# Altium PCB PCB2.PcbDoc
Units mm, origin at the board's own origin, x right, y up, seen from the top; angles counter-clockwise.
Board outline 96.65 x 43.18 mm, 2 copper layers (Top Layer, Bottom Layer); 19 components, 18 nets, 61 pads, 0 vias.
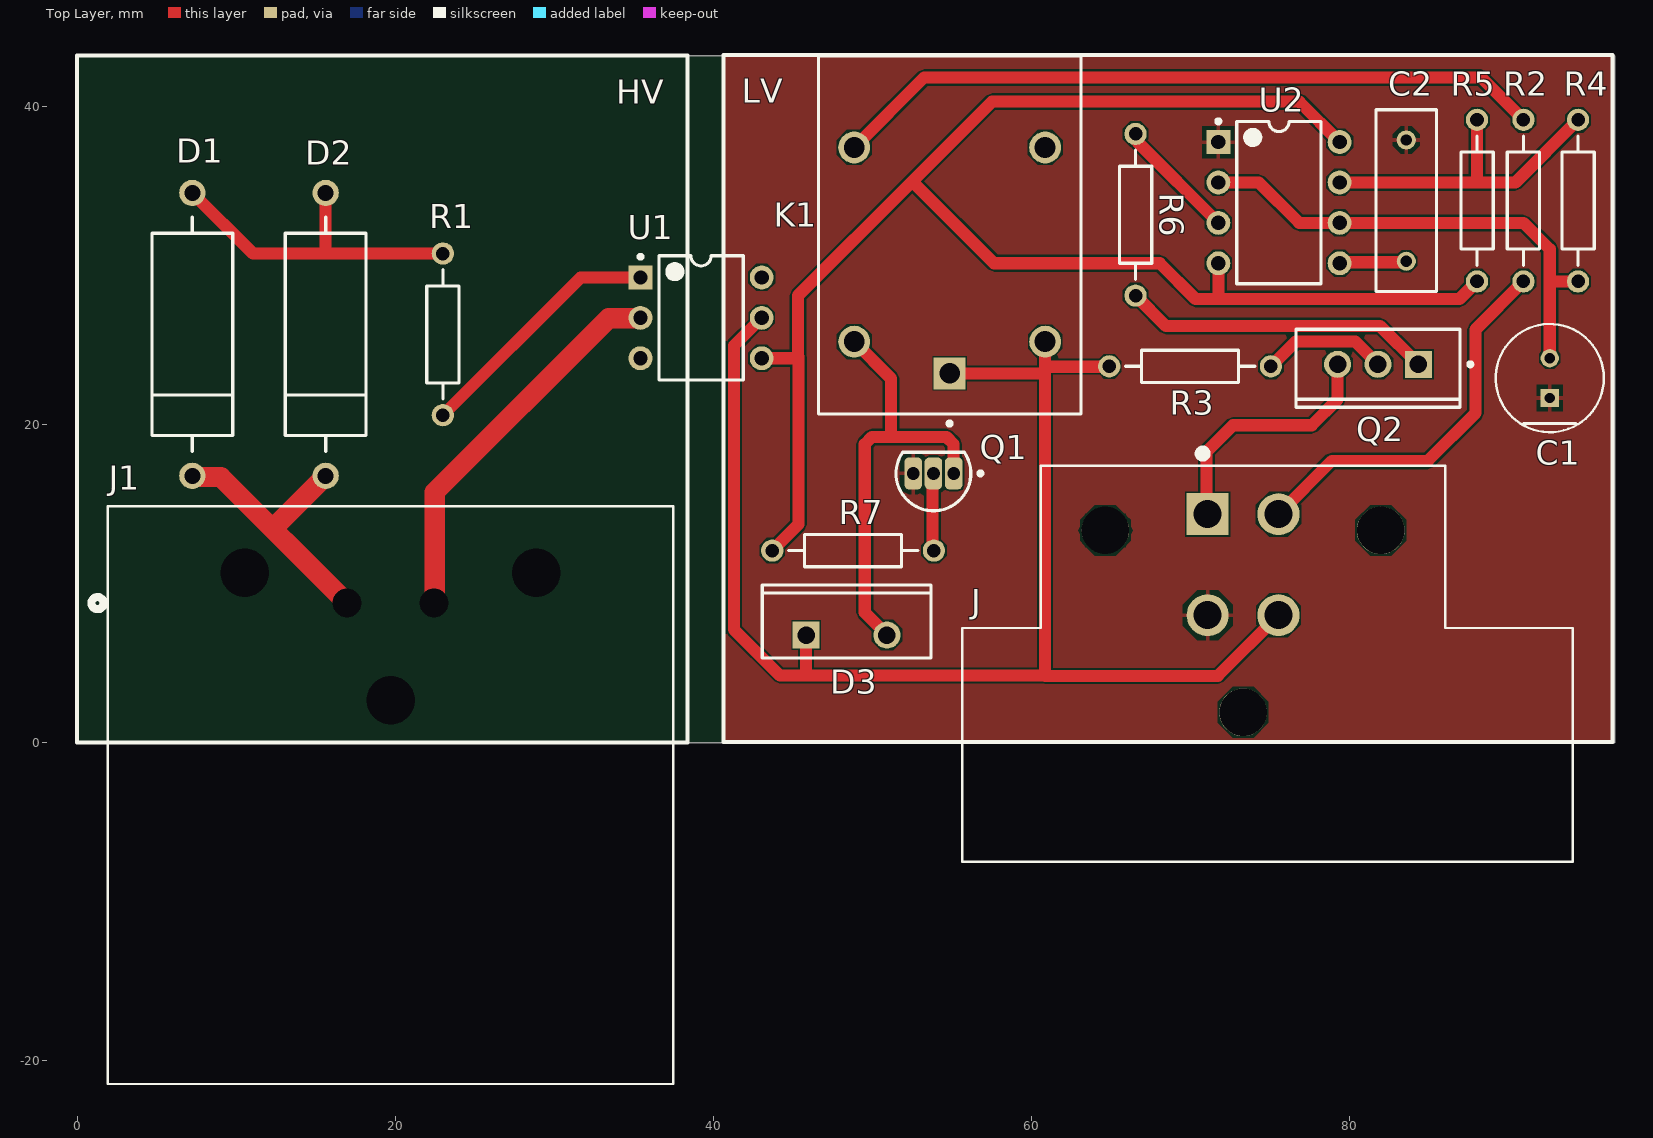
[diagram p0: Top Layer view]
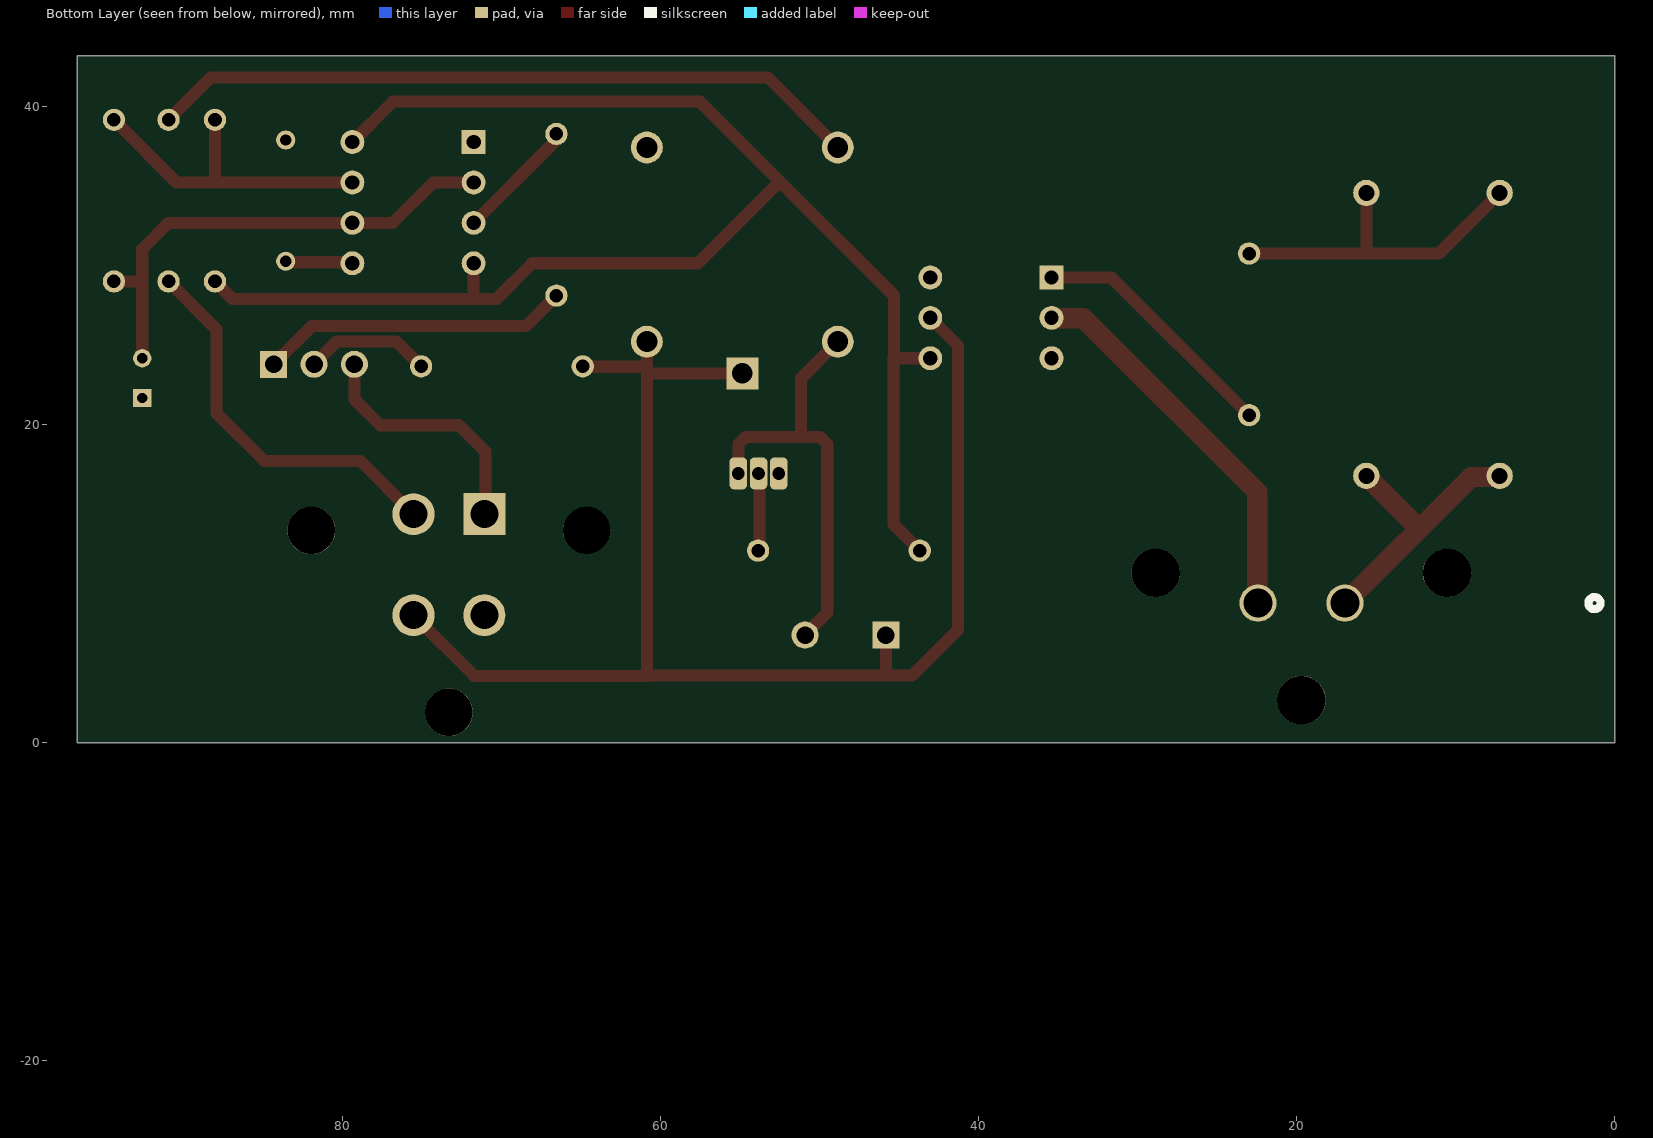
[diagram p1: Bottom Layer view, seen from below]

## Layer stack, top to bottom
Top Solder: solder mask 0.0102, Solder Resist, Dk 3.5
Top Layer: signal copper 0.0356
Dielectric 1: dielectric 0.32, FR-4, Dk 4.8
Bottom Layer: signal copper 0.0356
Bottom Solder: solder mask 0.0102, Solder Resist, Dk 3.5

## Board outline
0,0 0,43.18 96.647,43.18 96.647,0

## Design rules (kind name [scope] priority, off if disabled: settings)
Clearance [All] p1: gap=0.1 ignorepadtopadclearanceinfootprint=FALSE except(0: Arc-Hole Track-Hole SMDPad-Hole THPad-Hole Via-Hole Fill-Hole Poly-Hole Region-Hole Text-Hole)
PasteMaskExpansion [All] p1: expansion=-2539.975 usepaste=FALSE
PolygonConnect [All] p1: connectstyle=Relief reliefconductorwidth=0.254 reliefentries=4 polygonreliefangle="90 Angle" airgapwidth=0.254
RoutingVias [All] p1: holewidth=0.711 width=3 viastyle="Through Hole" minholewidth=0.711 minwidth=3 maxholewidth=0.711 maxwidth=3
SolderMaskExpansion [All] p1: expansion=0.254 istentingtop=FALSE
Width 12V [InNet('12V_LV')] p1: maxlimit=0.762 minlimit=0.762 preferedwidth=0.762 minimp=50.000000 maximp=50.000000 favimp=50.000000
Width HV- [InNet('HV-')] p2: maxlimit=1.27 minlimit=1.27 preferedwidth=1.27 minimp=50.000000 maximp=50.000000 favimp=50.000000
Width HV+ [InNet('HV+')] p3: maxlimit=1.27 minlimit=1.27 preferedwidth=1.27 minimp=50.000000 maximp=50.000000 favimp=50.000000
Width [All] p4: maxlimit=0.762 minlimit=0.762 preferedwidth=0.762 minimp=50.000000 maximp=50.000000 favimp=50.000000
29 further rules are at their usual default settings.

## Classes and differential pairs
component class Esquematico_TSAL_controladora: C1 C2 D1 D2 D3 J J1 K1 Q1 Q2 R1 R2 R3 R4 R5 R6 R7 U1

## Components (designator, comment, footprint, x,y, rotation, side; value= is the part's Value field where it differs from the comment)
C1 "UKL1A101KED1TD" FP-UKL1A101KED1TD-MFG 92.555,22.904 r90 top value=100uF
C2 "Cap" RAD-0.3 83.538,34.06 r90 top value=100pF
D1 "D Zener" DIODE-0.7 7.239,25.654 r270 top
D2 "D Zener" DIODE-0.7 15.621,25.654 r270 top
D3 "Diode 10TQ035" TO-220AC 48.359,6.755 r0 top
J "DT13-4P" TE_DT13-4P 73.279,8.001 r90 top
J1 "DT13-2P" CONN2_DT13-2P_TEC 16.967,8.763 r180 top
K1 "G5LE-14-CF-36 DC12" FP-G5LE-14-CF-36_DC12-MFG 54.836,31.901 r90 top
Q1 "BC548B" ONSC-TO-92-3-29-11 53.82,16.915 r180 top locked
Q2 "TIP122" ONSC-TO-220-3-221A-09 81.76,23.773 r270 top
R1 "Res2" AXIAL-0.4 22.987,25.654 r270 top value=570
R2 "Res2" AXIAL-0.4 90.904,34.06 r270 top value=23
R3 "Res2" AXIAL-0.4 69.949,23.646 r0 top value=24
R4 "Res2" AXIAL-0.4 94.333,34.06 r270 top value=1K
R5 "Res2" AXIAL-0.4 87.983,34.06 r90 top value=1K
R6 "Res2" AXIAL-0.4 66.52,33.171 r270 top value=600
R7 "Res2" AXIAL-0.4 48.768,12.065 r0 top value=2160
U1 "4N37" LTST-DIP-6_A 39.215,26.694 r0 top
U2 "NE555P" P0008A 75.537,33.933 r0 top

## Footprints (in the part's own frame and the unit in brackets; to place one, negate y for a bottom-side part, rotate by r counter-clockwise, add the part's x,y. Pads: shape width x height; smd on the part's side, far side on the other; paste and mask are expansions set on the pad)
AXIAL-0.4 [mm] "Axial Device, Thru-Hole; 2 Leads; 0.4 in Pin Spacing"
  round 1.4 hole 0.85: 1(-5.08,0) 2(5.08,0)
  silkscreen extent -4.06,-1.02 4.06,1.02
CONN2_DT13-2P_TEC [mil]
  round 60 / inner round 60 / far side round 92 hole 72 paste-46 mask+0: 1(0,0) 2(-215,0)
  round 60 / inner round 60 / far side round 120 hole 120 unplated paste-60 mask-60: 3(-468,-75) 4(253,-75) 5(-107.5,240)
  silkscreen extent -808,-240 632,1190
DIODE-0.7 [mm] "Diode, Thru-Hole; 2 Leads; 0.7 in Pin Spacing"
  round 1.65 hole 1: 1(-8.89,0) 2(8.89,0)
  silkscreen extent -7.37,-2.54 7.37,2.54
FP-G5LE-14-CF-36_DC12-MFG [mm]
  rect 2x2 hole 1.3 paste-1000 mask+0: 1(-8.7,0)
  round 2 hole 1.3 paste-1000 mask+0: 2(-6.7,-6) 3(5.5,-6) 4(5.5,6) 5(-6.7,6)
  silkscreen extent -11.97,-8.25 11.25,8.25, body extent -11.35,-8.35 11.35,8.35, height 0.25
FP-UKL1A101KED1TD-MFG [mm]
  rect 1.15x1.15 hole 0.65 paste-1000 mask+0: 1(-1.25,0)
  round 1.15 hole 0.65 paste-1000 mask+0: 2(1.25,0)
  silkscreen extent -3.4,-3.4 3.4,3.4, body extent -3.5,-3.5 3.5,3.5, height 0.25
LTST-DIP-6_A [mm] "DIP, 6-Leads, Body 7.8x7mm, Pitch 2.54mm"
  rect 1.5x1.5 hole 0.9: 1(-3.81,2.54)
  round 1.5 hole 0.9: 2(-3.81,0) 3(-3.81,-2.54) 4(3.81,-2.54) 5(3.81,0) 6(3.81,2.54)
  silkscreen extent -3.93,-3.9 2.65,3.96, body extent -3.95,-3.9 3.95,3.9, height 4.5
ONSC-TO-92-3-29-11 [mm] "TO, 3-Leads, Body Dia 4.7mm, Pitch 1.27mm"
  rrect50% 1.1x2 hole 0.8 mask+0.254: 1(-1.27,0) 3(1.27,0)
  rrect50% 1.1x2 hole 0.8 paste-2539.97 mask+0.05: 2(0,0)
  silkscreen extent -3.08,-1.34 2.35,2.35, body extent -2.35,-1.33 2.36,2.36, height 7.87
ONSC-TO-220-3-221A-09 [mm] "FM, 3-Leads, Body 10.3x4.85mm, Pitch 2.54mm"
  rect 1.7x1.7 hole 1.1: 1(0,2.54)
  round 1.7 hole 1.1: 2(0,0) 3(0,-2.54)
  silkscreen extent -2.2,-5.15 2.7,5.93, body extent -2.18,-5.15 2.67,5.15, height 19.85
P0008A [mm] "DIP, 8-Leads, Body 10.15x6.6mm, Pitch 2.54mm"
  rect 1.5x1.5 hole 0.9: 1(-3.81,3.81)
  round 1.5 hole 0.9: 2(-3.81,1.27) 3(-3.81,-1.27) 4(-3.81,-3.81) 5(3.81,-3.81) 6(3.81,-1.27) 7(3.81,1.27) 8(3.81,3.81)
  silkscreen extent -3.93,-5.1 2.65,5.23, body extent -3.95,-5.07 3.95,5.07, height 5.08
RAD-0.3 [mm] "Radial Cap, Thru-Hole; 2 Leads; 0.3 in Pin Spacing"
  round 1.2 hole 0.7: 1(-3.81,0) 2(3.81,0)
  silkscreen extent -5.71,-1.91 5.71,1.91
TE_DT13-4P [mm]
  rect 2.64x2.64 hole 1.76: 1(6.35,2.225)
  round 2.64 hole 1.76: 2(6.35,-2.225) 3(0,-2.225) 4(0,2.225)
  round 2.99 hole 2.99 unplated: ""(-6.1,0) ""(5.33,-8.65)
  oval 2.53x2.99 hole 2.99 unplated: ""(5.33,8.65)
  silkscreen extent -15.5,-20.71 10.41,17.64
TO-220AC [mm] "TO, Thru-Hole, Vertical, Heatsink Mounted; 3 In-Line Leads (1 Absent); Pitch 2.54 mm"
  rect 1.7x1.7 hole 1.1: 1(-2.54,0)
  round 1.7 hole 1.1: 3(2.54,0)
  silkscreen extent -5.3,-1.45 5.3,3.15

## Part data
C1: library part CMP-12462-000006-1, "CAP ALUM 100UF 10% 10V RADIAL", Capacitance=100uF, Leakage Current=2uA, Manufacturer=Nichicon, Package=0, Ripple Current=180mA, Temperature="-40°C to +85°C", Temperature Range High=+85°C, Temperature Range Low=-40°C, Tolerance=10%, Voltage Rating=10V, Automotive=No, Category=Cap, ComponentLink2Description=Datasheet, ComponentLink2URL=https://www.nichicon.co.jp/english/products/pdfs/e-ukl.pdf, Device Class L1="Passive Components", Device Class L2=Capacitors, Device Class L3="Aluminum Electrolytic Capacitors", Digikey Description="CAP ALUM 100UF 10% 10V RADIAL", Dissipation Factor=15%, Height=12mm, Lead Free=Yes, Life=2000Hours, Manufacturer Part Number=UKL1A101KED1TD, Material=Aluminum, Octopart=https://octopart.com/ukl1a101ked1td-nichicon-20309866, RoHS=TRUE
C2: "Capacitor", LatestRevisionDate=17-Jul-2002, LatestRevisionNote="Re-released for DXP Platform.", PackageDescription="Radial Cap, Thru-Hole; 2 Leads; 0.3 in Pin Spacing", PackageReference=RAD-0.3, Published=8-Jun-2000, Publisher="Altium Limited"
D1 D2: "Zener Diode", LatestRevisionDate=17-Jul-2002, LatestRevisionNote="Re-released for DXP Platform.", PackageDescription="Diode, Thru-Hole; 2 Leads; 0.7 in Pin Spacing", PackageReference=DIODE-0.7, Published=8-Jun-2000, Publisher="Altium Limited"
D3: "Schottky Rectifier", ComponentLink1Description="Manufacturer Link", ComponentLink1URL=http://www.irf.com/, ComponentLink2Description=Datasheet, ComponentLink2URL=http://www.irf.com/product-info/datasheets/data/10tq.pdf, DatasheetVersion=PD-2.057B, LatestRevisionDate=17-Jul-2002, LatestRevisionNote="Re-released for DXP Platform.", Note="Terminal 2 is the TAB and is electrically connected to the cathode", PackageDescription="TO, Thru-Hole, Vertical, Heatsink Mounted; 3 In-Line Leads (1 Absent); Pitch 2.54 mm", PackageReference=TO-220AC, PackageVersion=Feb-1998, Published=8-Jun-2000, Publisher="Altium Limited"
J: "DT13 Series, 4.44mm Pitch 4 Way 2 Row Right Angle PCB Header, Solder Termination", Package=None, Availability=Unavailable, MF="TE Connectivity", MP=DT13-4P, Price=None, SnapEDA_Link=https://www.snapeda.com/parts/DT13-4P/TE%20Connectivity%20Deutsch%20Connectors/view-part/2708791/?ref=snap, TE_purchase_URL=https://www.te.com/usa-en/product-DT13-4P.html?te_bu=Cor&te_type=disp&te_campaign=seda_glo_cor-seda-global-disp-prtnr-fy19-seda-model-bom-cta_sma-317_1&elqCampaignId=32493
J1: "No Description Available", Mfr_Name="TE Connectivity", RefDes=RefDes, Type=-
K1: library part CMP-08822-000100-1, "RELAY GEN PURPOSE", Coil Current=30mA, Coil Power=360mW, Coil Resistance=400R, Coil Voltage (DC)=12V, Contact Current Rating=10A, Max Operating Temperature=85°C, Max Voltage Rating (AC)=250V, Max Voltage Rating (DC)=125V, Min Operating Temperature=-40°C, Package Quantity=100, Coil Type=Non-Latching, Contact Material=Tin, Height=19mm, Length=22.5mm, Max Current Rating=10A, Mount="Through Hole", Operate Time=10ms, Packaging=Bulk, Power Consumption=360mW, Radiation Hardening=No, Relay Type="General Purpose", Release Time=5ms, Termination="PC Pin", Throw Configuration=SPDT, Weight=0.423288oz, Width=15.6mm
Q1: library part CMP-1048-01456-1, "Amplifier Transistor, NPN Silicon, 3-Pin TO-92, Bulk Box", Manufacturer="On Semiconductor", ComponentLink1Description="Manufacturer URL", ComponentLink1URL=http://www.onsemi.com/, ComponentLink2Description=Datasheet, ComponentLink2URL=http://www.onsemi.com/pub_link/Collateral/BC546-D.PDF, ComponentLink3Description="Package Specification", ComponentLink3URL=http://www.onsemi.cn/pub_link/Collateral/2N6426-D.PDF, DatasheetVersion="Rev. 7", fT Min (MHz)=150, IC Continuous (A)=0.1, Mounting Technology="Through Hole", PackageDescription="3-Pin Transistor Outline, Body 4.825 x 3.685 mm, Pitch 1.27 mm", PackageReference=TO-92-3-29-11_AM_SL, PackageVersion="Rev. AM", Packing="Bulk Box", PartNumber=BC548B, Polarity=NPN, RoHS=FALSE
Q2: library part CMP-1047-00126-1, "Plastic Medium-Power, Complementary Silicon Transistor, 3-Pin TO-220, Tube", Manufacturer="On Semiconductor", ComponentLink1Description="Manufacturer URL", ComponentLink1URL=http://www.onsemi.com/, ComponentLink2Description=Datasheet, ComponentLink2URL=http://www.onsemi.cn/pub_link/Collateral/TIP120-D.PDF, ComponentLink3Description="Package Specification", ComponentLink3URL=http://www.onsemi.com/pub_link/Collateral/221A-09.PDF, DatasheetVersion="Rev. 8", IC Continuous (A)=5, Mounting Technology="Through Hole", PackageDescription="3-Pin Flange Mount, Vertical Straight Lead, Body 9.97 x 4.445 mm, Pitch 2.54 mm", PackageReference=TO-220-3-221A-09, PackageVersion="Rev. AG, 09/2011", Packing=Tube, PartNumber=TIP122, Polarity=NPN, RoHS=FALSE
R1 R2 R3 R4 R5 R6 R7: "Resistor", LatestRevisionDate=17-Jul-2002, LatestRevisionNote="Re-released for DXP Platform.", PackageDescription="Axial Device, Thru-Hole; 2 Leads; 0.4 in Pin Spacing", PackageReference=AXIAL-0.4, Published=8-Jun-2000, Publisher="Altium Limited"
U1: library part CMP-2000-05615-1, "Photocoupler - Phototransistor Output, 1500 Vrms, -55 to 100 degC, 6-Pin DIP, RoHS, Tube", Current Transfer Ratio=50%, Forward Current=60mA, Isolation Voltage=5000Vrms, Manufacturer=Vishay, Maximum Collector Current=100mA, Maximum Collector Emitter Voltage=30V, Maximum Forward Diode Voltage=1.5V, Maximum Operating Temperature=+100C, Maximum Power Dissipation=70mW, Maximum Reverse Diode Voltage=6V, Minimum Operating Temperature=-55C, Package / Case=PDIP-6, Package Description="6-Pin Double In-line Package, Body 7.3 x 6.5 mm, Pitch 2.54 mm", Package Reference=DIP-6, Brand=VishaySemiconductors, Configuration=1Channel, Datasheet URL=http://optoelectronics.liteon.com/upload/download/DS-70-99-0012/S_110_4N3X%20Series%201115.pdf, Datasheet Version="Rev. D, 12/2015", Factory Pack Quantity=3000, Input Type=DC, Manufacturer URL=http://www.us.liteon.com/, Maximum Input Diode Current=60mA, Mounting Technology=ThroughHole, Number of Channels=1Channel, Number of Channels per Chip=1Channel, Output Device=NPNPhototransistor, Output Type=DC, Packaging=Tube, Product Category=TransistorOutputOptocouplers, RoHS=Details
U2: library part CMP-2000-04954-1, "Precision Timer, 4.5 to 16 V, 0 to 70 degC, 8-Pin DIP, Pb-Free, Tube", Manufacturer=TexasInstruments, Maximum High Level Output Current=-200mA, Maximum Low Level Output Current=200mA, Operating Supply Voltage=5, Package=8PDIP, Package Description="8-Pin Double In-line Package, Body 9.59 x 6.35 mm, Pitch 2.54 mm", Package Reference=P8, Category=Timer, Datasheet URL=http://www.ti.com/general/docs/lit/getliterature.tsp?genericPartNumber=NE555&fileType=pdf, Datasheet Version="Rev. I, 09/2014", Manufacturer URL=http://www.ti.com/, Number of Internal Timers=1, Package URL=http://www.ti.com/lit/ml/mpdi001b/mpdi001b.pdf, Packaging=Rail/Tube, Rad Hard=No, Type=Standard

## Nets (pads, with @x,y where several pads share a name; then routed paths per layer and width w, separated by ;. In a path a pad name is that pad's centre, name@x,y a point inside that pad or via, vN(x,y) a via of type N, cw(c..) or ccw(c..) an arc to the next point about the centre after c; other vN are vias at no path point)
12V_LV: D3.1 J.3 K1.1 K1.2 R3.1 U1.5 | length 90.9
  Top Layer w0.762: U1.5 41.275,24.943 41.275,7.108 44.168,4.215 45.819,4.215 ; D3.1 45.819,4.215 ; K1.1 60.793,23.201 60.833,23.241 ; 60.809,4.215 45.819,4.215 ; 60.833,23.622 60.836,23.622 ; K1.2 60.836,23.622 ; R3.1 64.846,23.622 60.836,23.622 ; J.3 71.694,4.191 60.836,4.191 60.836,23.622
GND_LV: C1.1 C2.2 J.4 Q1.3 U2.1
HV+: D1.2 D2.2 J1.1 | length 17.5
  Top Layer w1.27: D1.2@7.366,16.764 7.366,16.74 7.415,16.691 9.039,16.691 J1.1 ; 12.319,13.589 12.446,13.589 D2.2
HV-: J1.2 U1.2 | length 24.4
  Top Layer w1.27: J1.2 22.479,8.763 22.477,8.765 22.477,8.88 22.479,8.883 22.479,15.748 33.401,26.67 U1.2@35.32,26.67
NetC1_2: C1.2 R4.2 U2.2 U2.6 | length 31.2
  Top Layer w0.762: U2.2 74.267,35.203 76.807,32.663 U2.6 90.904,32.663 92.555,31.012 92.555,28.98 ; C1.2 92.555,28.98 ; R4.2 92.555,28.98
NetC2_1: C2.1 U2.5 | length 4.2
  Top Layer w0.762: U2.5 79.411,30.186 83.475,30.186 C2.1
NetD1_1: D1.1 D2.1 R1.1 | length 21.2
  Top Layer w0.762: D1.1 11.049,30.734 15.494,30.734 ; D2.1 15.621,30.861 15.494,30.734 ; R1.1 15.494,30.734
NetD3_3: D3.3 K1.5 Q1.1 | length 27.3
  Top Layer w0.762: K1.5 51.153,22.884 51.153,19.201 ; D3.3 50.899,6.779 49.502,8.176 49.502,18.754 49.949,19.201 51.153,19.201 ; Q1.1 55.09,18.754 54.644,19.201 51.153,19.201
NetK1_4: K1.4 R2.1 | length 45
  Top Layer w0.762: K1.4 53.242,41.807 88.237,41.807 R2.1
NetQ1_2: Q1.2 R7.2 | length 5
  Top Layer w0.762: R7.2@53.693,11.962 53.757,12.025 53.757,16.851 Q1.2
NetQ2_1: Q2.1 R6.2 | length 19.6
  Top Layer w0.762: R6.2 68.425,26.186 81.887,26.186 Q2.1
NetQ2_2: Q2.2 R3.2 | length 8
  Top Layer w0.762: R3.2 76.587,25.204 80.329,25.204 Q2.2
NetR1_2: R1.2 U1.1 | length 16.1
  Top Layer w0.762: R1.2@22.86,20.574 R1.2 31.647,29.234 U1.1
NetR4_1: R4.1 R5.2 U2.7 | length 20.6
  Top Layer w0.762: U2.7 87.983,35.203 ; R5.2 87.983,35.203 ; R4.1 90.396,35.203 87.983,35.203
NetR5_1: R5.1 R7.1 U1.4 U2.4 U2.8 | length 100.4
  Top Layer w0.762: U1.4 45.311,24.154 ; R7.1 45.339,13.716 45.339,24.257 ; 45.311,24.257 45.311,28.091 52.487,35.266 ; U2.4 71.727,27.882 ; U2.8 76.807,40.283 57.503,40.283 52.487,35.266 ; R5.1 86.886,27.882 71.727,27.882 ; 52.487,35.266 57.63,30.123 68.044,30.123 70.285,27.882 71.727,27.882
NetR6_1: R6.1 U2.3 | length 7.7
  Top Layer w0.762: R6.1 66.642,38.128 66.642,37.747 U2.3
Out_GREEN: J.2 R2.2 | length 24.6
  Top Layer w0.762: J.2 78.859,17.706 84.889,17.706 87.884,20.701 87.884,25.959 90.881,28.956 90.932,28.956 90.908,28.98 R2.2
Out_RED: J.1 Q2.3 | length 15.7
  Top Layer w0.762: J.1@70.993,14.351 70.993,18.288 72.644,19.939 77.597,19.939 79.22,21.562 Q2.3
pads on no net: J1.3 J1.4 J1.5 J. K1.3 U1.3 U1.6

## Polygon pours and split planes (outlines as drawn)
GND_LV on Top Layer "GND_LV_L01_P000" (solid, pour order 0): 40.612,0.024 40.612,0.405 40.612,43.204 96.647,43.204 96.647,0.024

## Silkscreen, mask and mechanical layers (free items; w line width, h text height)
Top Overlay:
  lines w0.254: 0,0 38.354,0 38.354,43.18 0,43.18 0,0 ; 40.612,0.024 96.492,0.024 96.492,43.204 40.612,43.204 40.612,0.024
  text "LV" at 41.766,40.199 h1.52
  text "HV" at 33.881,40.156 h1.52